# Altium PCB ROBOT_MOTHERBOARD.PcbDoc (part 1 of 3)
Units mm, origin at the board's own origin, x right, y up, seen from the top; angles counter-clockwise.
Board outline 122.81 x 59.7 mm, 4 copper layers (SIG1, GND, PWR, SIG2), stack 0.603 mm thick; 150 components, 74 nets, 540 pads, 464 vias.
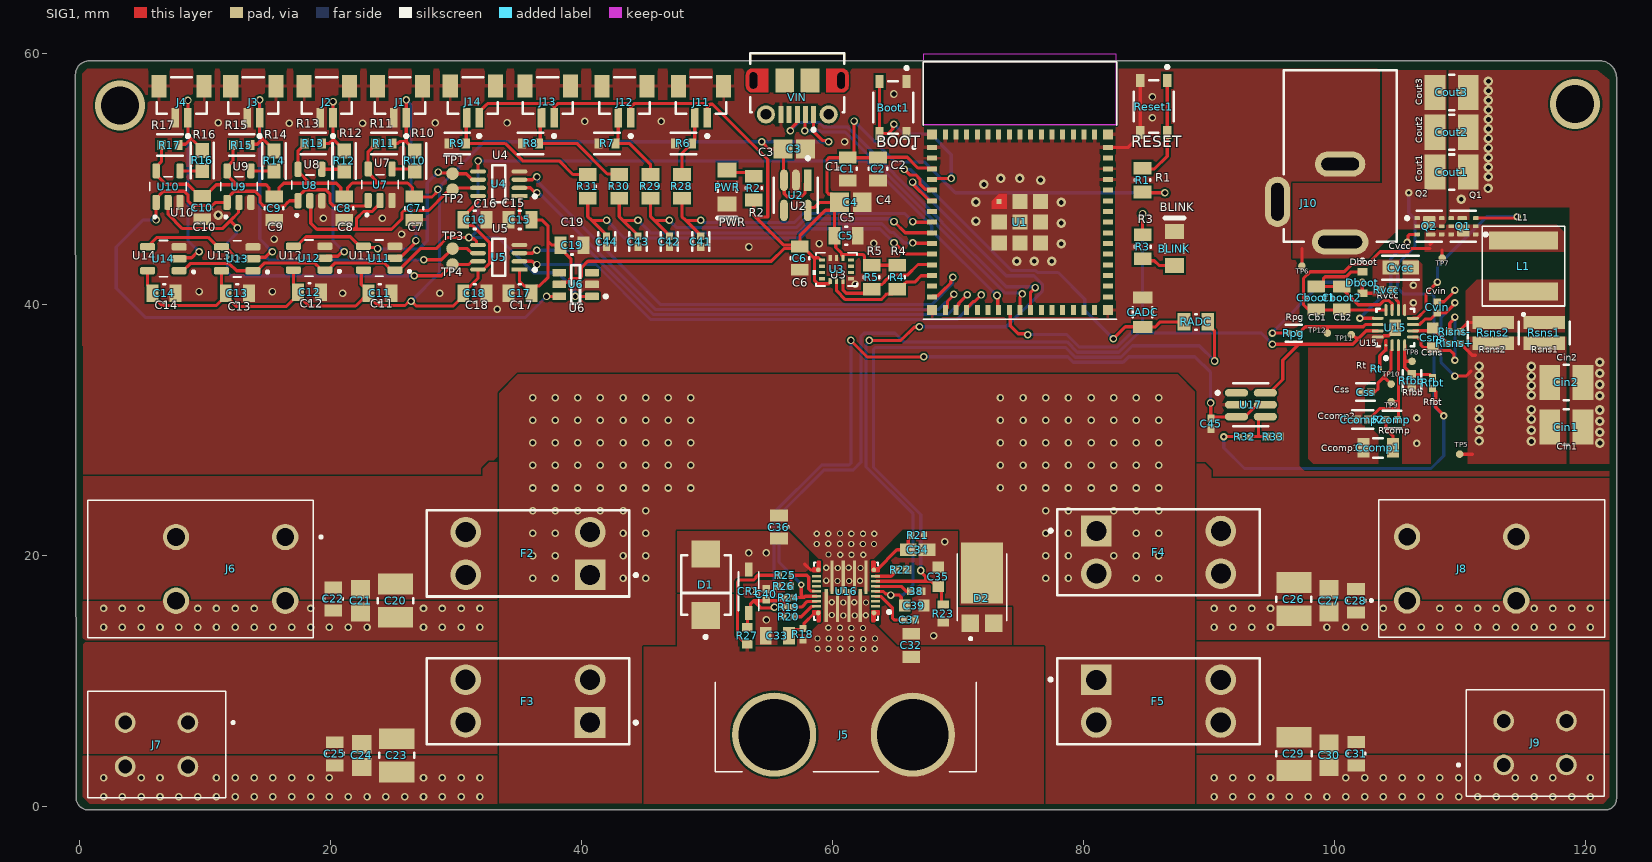
[diagram p0: SIG1 view]
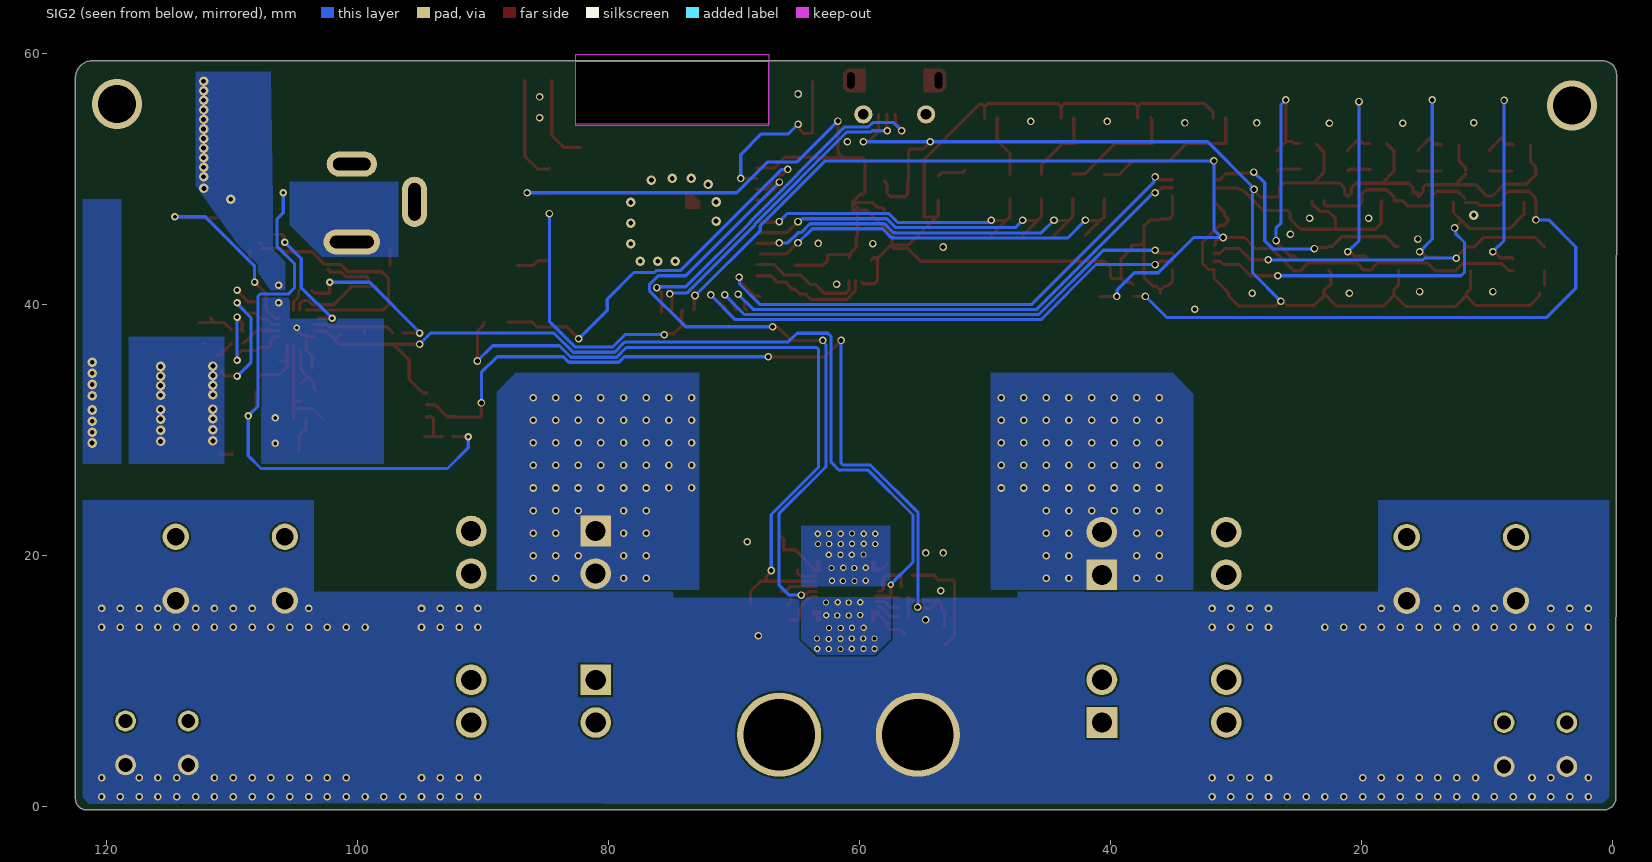
[diagram p1: SIG2 view, seen from below]
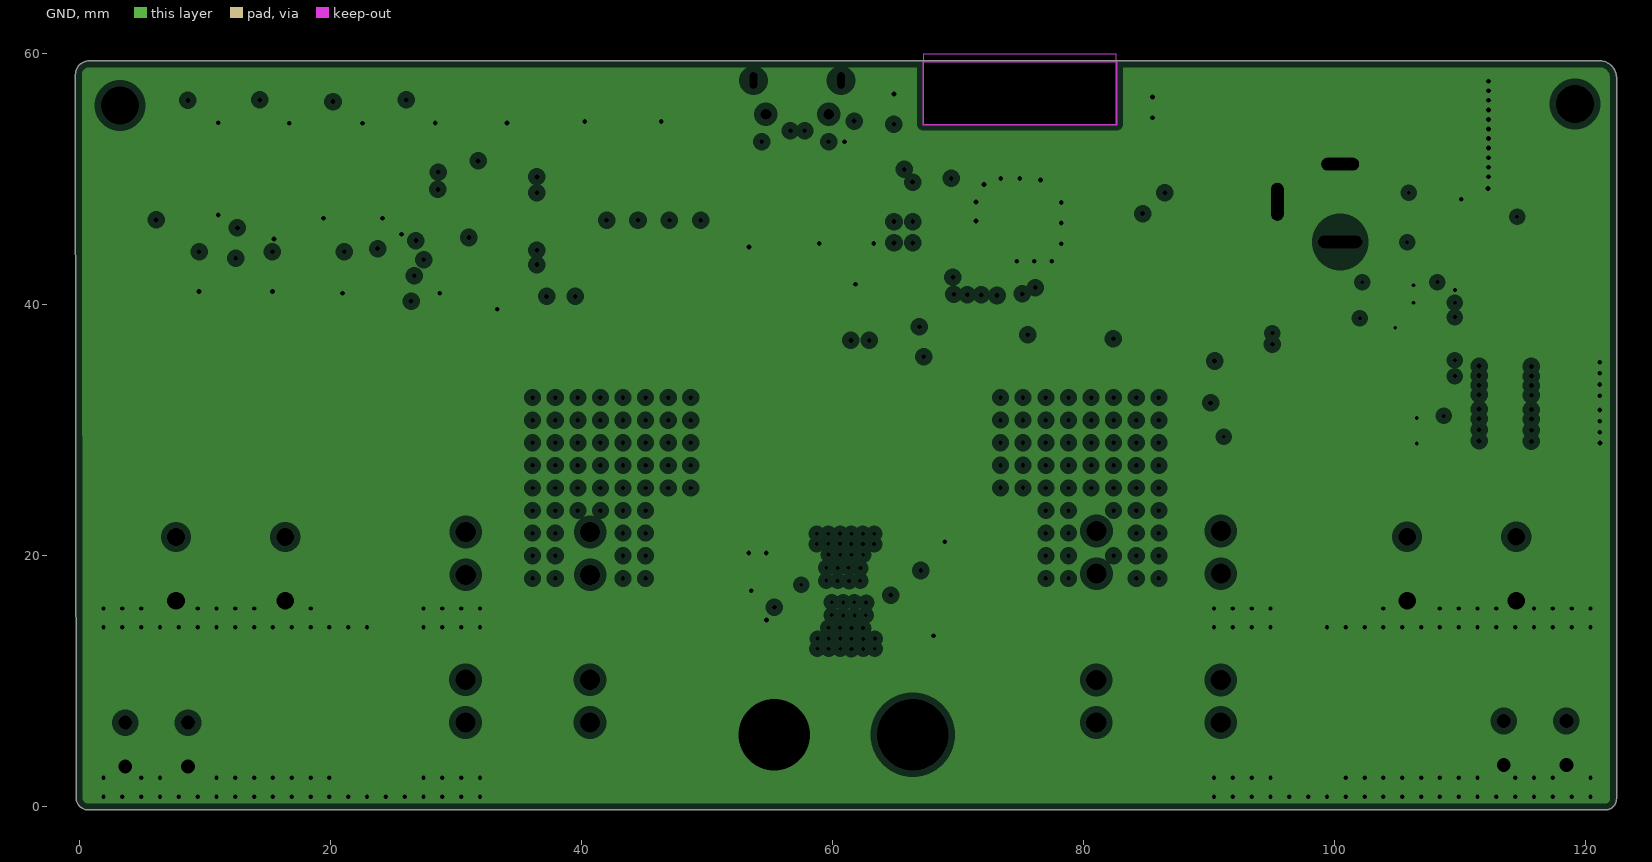
[diagram p2: GND, clearances drawn from the general rule]
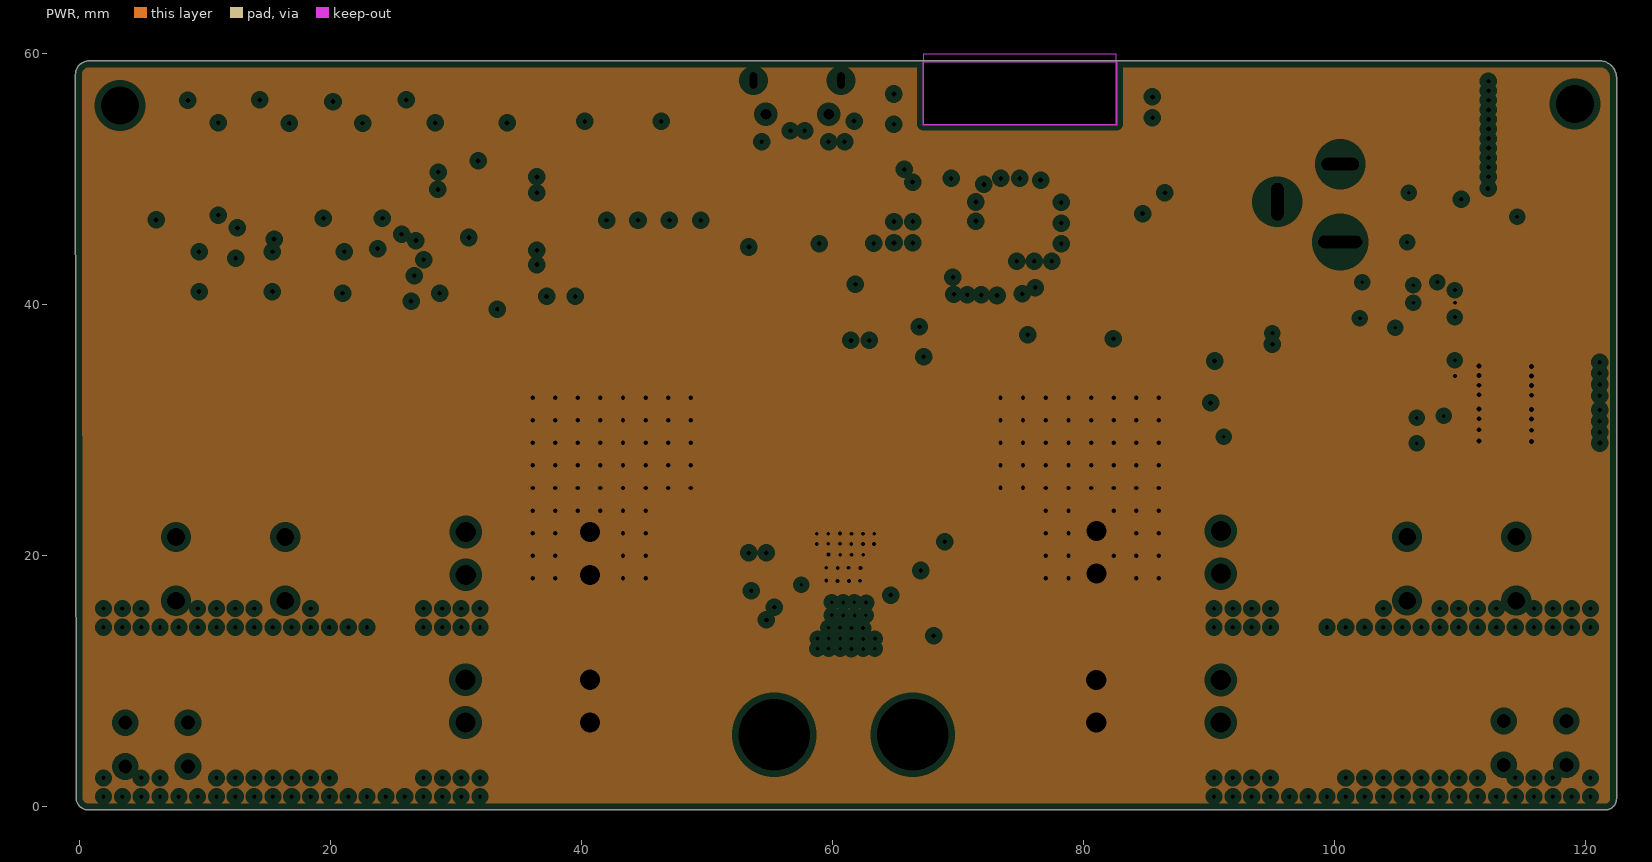
[diagram p3: PWR, clearances drawn from the general rule]
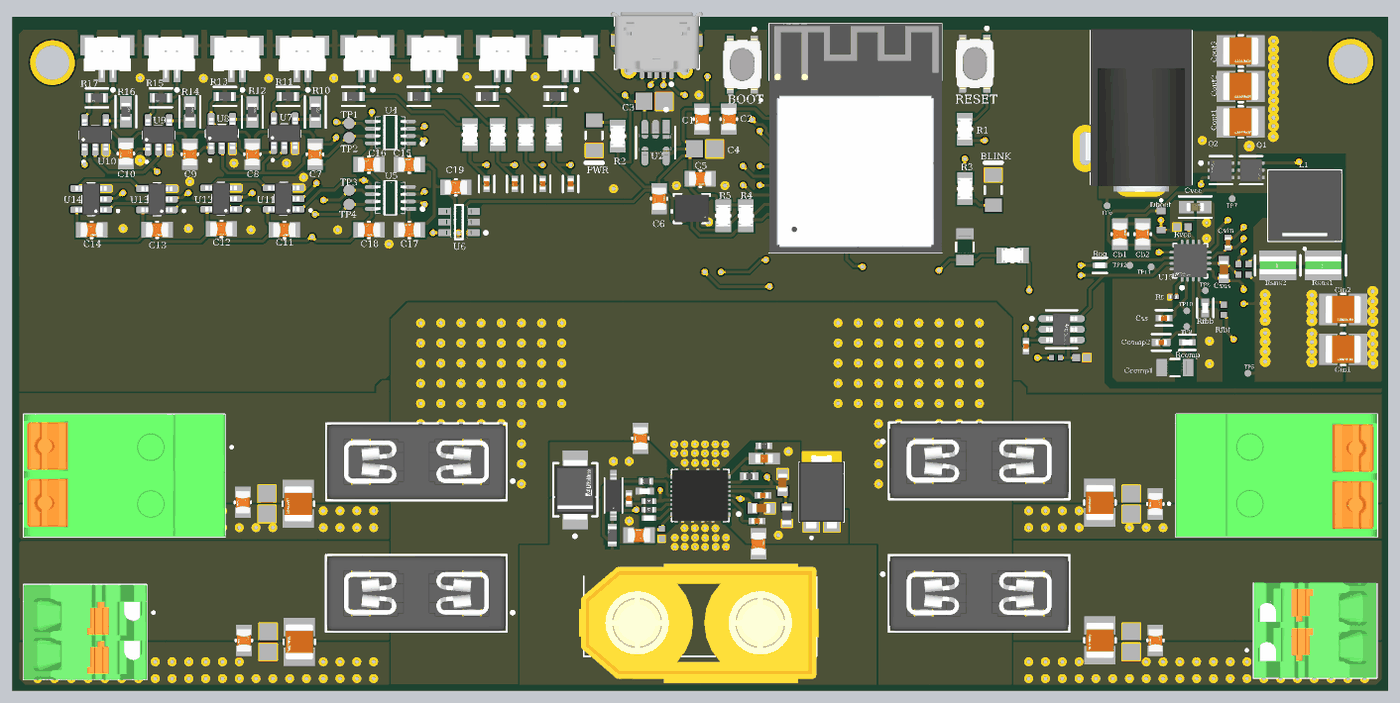
[diagram p5: 3D render of the assembled board from above, using the file's embedded part models]

## Layer stack, top to bottom
Top Solder: solder mask 0.0102, Solder Resist, Dk 3.5
SIG1: signal copper 0.0356
Dielectric 2: prepreg 0.0711, PP-006, Dk 4.1
GND: plane copper 0.035, net GND
Dielectric 1: dielectric 0.32, FR-4, Dk 4.8
PWR: plane copper 0.035, net 11V1+
Dielectric 3: prepreg 0.0711, PP-006, Dk 4.1
SIG2: signal copper 0.0356
Bottom Solder: solder mask 0.0102, Solder Resist, Dk 3.5

## Board outline
-0.284,0.685 -0.329,58.331 cw(c0.746,58.331) 0.746,59.406 0.686,59.406 121.07,59.406 121.07,59.413 cw(c121.134,58.068) 122.48,58.009 122.48,0.605 cw(c121.591,0.605) 121.591,-0.284 0.687,-0.284 0.685,-0.284 cw(c0.685,0.685)
cut-out: 67.23,54.356 82.63,54.356 82.63,59.944 67.23,59.944

## Design rules (kind name [scope] priority, off if disabled: settings)
Clearance Clearance_1 [All] p1: gap=0.15 ignorepadtopadclearanceinfootprint=TRUE
Clearance [InComponent('U16')] p2: gap=0.1 ignorepadtopadclearanceinfootprint=TRUE
HoleSize [All] p1: absolutevalues=TRUE maxlimit=6 minlimit=0.025 maxpercent=80.000 minpercent=20.000
PlaneClearance [All] p1: clearance=0.508
PlaneConnect [All] p1: planeconnectstyle=Direct reliefexpansion=0.508 reliefentries=4 reliefconductorwidth=0.254 reliefairgap=0.254
PolygonConnect [All] p1: connectstyle=Relief reliefconductorwidth=0.254 reliefentries=4 polygonreliefangle="90 Angle" airgapwidth=0.254
RoutingVias [All] p1: holewidth=0.711 width=1.27 viastyle="Through Hole" minholewidth=0.711 minwidth=1.27 maxholewidth=0.711 maxwidth=1.27
SolderMaskExpansion [All] p1: expansion=0.102 istentingtop=FALSE
SupplyNets "Schematic Supply Nets_2" [InNet('3V3')] p1: voltage=0.000
SupplyNets "Schematic Supply Nets_1" [InNet('+5')] p2: voltage=0.000
SupplyNets "Schematic Supply Nets" [InNet('GND')] p3: voltage=0.000
Width [All] p1: maxlimit=1 minlimit=0.254 preferedwidth=0.254
27 further rules are at their usual default settings.

## Classes and differential pairs
component class Battery_power: 38 C32 C33 C34 C35 C36 C37 C39 C40 C41 C42 C43 C44 CADC CR1 D1 D2 R18 R19 R20 R21 R22 R23 R24 R25 R26 R27 R28 R29 R30 R31 RADC U16
component class Jetson_power: C20 C21 C22 C23 C24 C25 C26 C27 C28 C29 C30 C31 C45 Cboot1 Cboot2 Ccomp1 Ccomp2 Cin1 Cin2 Cout1 Cout2 Cout3 Csns Css Cvcc Cvin Dboot F2 F3 F4 F5 J5 J6 J7 J8 J9 J10 L1 Q1 Q2 R32 R33 Rcomp Rfbb Rfbt Risns+ Risns- Rpg Rsns1 Rsns2 Rt Rvcc U15 U17
component class UART_LOGIC: C7 C8 C9 C10 C11 C12 C13 C14 C15 C16 C17 C18 C19 J1 J2 J3 J4 R10 R11 R12 R13 R14 R15 R16 R17 U4 U5 U6 U7 U8 U9 U10 U11 U12 U13 U14
component class MCU_IMU: BLINK Boot1 C1 C2 C3 C4 C5 C6 J11 J12 J13 J14 PWR R1 R2 R3 R4 R5 R6 R7 R8 R9 Reset1 U1 U2 U3 VIN

## Components (designator, comment, footprint, x,y, rotation, side; value= is the part's Value field where it differs from the comment)
38 "GRM155R71H104KE14D" FP-GRM155-0_05-IPC_B 66.675,17.145 r0 top
BLINK "SML-LX1206IC-TR" LUMX-SML-LX1206IC_V 87.249,44.45 r90 top
Boot1 "PTS810SJM250SMTRLFS" FP-PTS810SJM250SMTRLFS-MFG 64.83,55.689 r270 top
C1 "CC0805KRX7R9BB104" FP-CC0805-0_85-MFG#1 61.214,50.8 r270 top value="100 nF"
C2 "CC0805KRX7R9BB104" FP-CC0805-0_85-MFG#1 63.627,50.8 r270 top value="100 nF"
C3 "C0805C105K5RACTU" CAPC2013X140X50ML20T25#1 56.956,52.387 r180 top
C4 "C0805C105K5RACTU" CAPC2013X140X50ML20T25#2 61.468,48.133 r180 top
C5 "CC0805KRX7R9BB104" FP-CC0805-0_85-MFG#1 61.087,45.466 r0 top value="100 nF"
C6 "CC0805KRX7R9BB104" FP-CC0805-0_85-MFG#1 57.404,43.688 r90 top value="100 nF"
C7 "CC0805KRX7R9BB104" FP-CC0805-0_85-MFG#2 26.67,47.661 r90 top value="100 nF"
C8 "CC0805KRX7R9BB104" FP-CC0805-0_85-MFG#1 21.082,47.661 r270 top value="100 nF"
C9 "CC0805KRX7R9BB104" FP-CC0805-0_85-MFG#1 15.494,47.661 r270 top value="100 nF"
C10 "CC0805KRX7R9BB104" FP-CC0805-0_85-MFG#1 9.779,47.716 r270 top value="100 nF"
C11 "CC0805KRX7R9BB104" FP-CC0805-0_85-MFG#1 23.934,40.891 r0 top value="100 nF"
C12 "CC0805KRX7R9BB104" FP-CC0805-0_85-MFG#1 18.321,40.975 r0 top value="100 nF"
C13 "CC0805KRX7R9BB104" FP-CC0805-0_85-MFG#1 12.573,40.902 r0 top value="100 nF"
C14 "CC0805KRX7R9BB104" FP-CC0805-0_85-MFG#1 6.731,40.894 r0 top value="100 nF"
C15 "CC0805KRX7R9BB104" FP-CC0805-0_85-MFG#1 35.088,46.736 r180 top value="100 nF"
C16 "CC0805KRX7R9BB104" FP-CC0805-0_85-MFG#1 31.496,46.736 r0 top value="100 nF"
C17 "CC0805KRX7R9BB104" FP-CC0805-0_85-MFG#1 35.088,40.894 r180 top value="100 nF"
C18 "CC0805KRX7R9BB104" FP-CC0805-0_85-MFG#1 31.496,40.894 r0 top value="100 nF"
C19 "CC0805KRX7R9BB104" FP-CC0805-0_85-MFG#1 39.243,44.704 r0 top value="100 nF"
C20 "CL32A106KBJNNNE" FP-CL32-IPC_B 25.18,16.399 r270 top
C21 "C0805C105K5RACTU" CAPC2013X140X50ML20T25#1 22.386,16.399 r90 top
C22 "CC0805KRX7R9BB104" FP-CC0805-0_85-MFG#1 20.227,16.526 r270 top value="100 nF"
C23 "CL32A106KBJNNNE" FP-CL32-IPC_B 25.273,4.056 r270 top
C24 "C0805C105K5RACTU" CAPC2013X140X50ML20T25#1 22.479,4.056 r90 top
C25 "CC0805KRX7R9BB104" FP-CC0805-0_85-MFG#1 20.32,4.183 r270 top value="100 nF"
C26 "CL32A106KBJNNNE" FP-CL32-IPC_B 96.766,16.51 r270 top
C27 "C0805C105K5RACTU" CAPC2013X140X50ML20T25#1 99.568,16.383 r90 top
C28 "CC0805KRX7R9BB104" FP-CC0805-0_85-MFG#1 101.719,16.383 r270 top value="100 nF"
C29 "CL32A106KBJNNNE" FP-CL32-IPC_B 96.774,4.191 r270 top
C30 "C0805C105K5RACTU" CAPC2013X140X50ML20T25#1 99.568,4.064 r90 top
C31 "CC0805KRX7R9BB104" FP-CC0805-0_85-MFG#1 101.727,4.191 r270 top value="100 nF"
C32 "CC0805KRX7R9BB104" FP-CC0805-0_85-MFG#1 66.275,12.827 r90 top value="100 nF"
C33 "CC0805KKX7R9BB225" FP-CC0805-0_85-MFG#1 55.607,13.589 r180 top value="2.2 uF"
C34 "C1608C0G1E472J080AA" FP-C1608-080-0_1-IPC_A 66.783,20.447 r180 top
C35 "GRM1885C1H101JA01D" CAPC1608X90N 68.434,18.288 r270 top value=100pF
C36 "CC0805KKX7R9BB225" FP-CC0805-0_85-MFG#1 55.734,22.261 r270 top value="2.2 uF"
C37 "GRM155R71H104KE14D" FP-GRM155-0_05-IPC_B 66.148,14.859 r0 top
C39 "GRM1885C1H101JA01D" CAPC1608X90N 66.529,16.002 r180 top value=100pF
C40 "GRM155R71H104KE14D" FP-GRM155-0_05-IPC_B 54.718,16.891 r90 top
C41 "GRM155R71H104KE14D" FP-GRM155-0_05-IPC_B 49.5,45 r270 top
C42 "GRM155R71H104KE14D" FP-GRM155-0_05-IPC_B 47,45 r270 top
C43 "GRM155R71H104KE14D" FP-GRM155-0_05-IPC_B 44.5,45 r270 top
C44 "GRM155R71H104KE14D" FP-GRM155-0_05-IPC_B 42,45 r270 top
C45 "GRM155R71H104KE14D" FP-GRM155-0_05-IPC_B 90.17,30.48 r270 top
CADC "CGA4C2C0G1H822J060AA" FP-CGA4J-IPC_A 84.709,39.37 r90 top
Cboot1 "CC0805KRX7R9BB104" FP-CC0805-0_85-MFG#1 98.552,40.513 r90 top value="100 nF"
Cboot2 "CC0805KRX7R9BB104" FP-CC0805-0_85-MFG#1 100.584,40.513 r90 top value="100 nF"
Ccomp1 "CGA4C2C0G1H822J060AA" FP-CGA4J-IPC_A 103.473,28.575 r180 top
Ccomp2 "GRM1555C1H391JA01J" FP-GRM155-0_05-IPC_A 102.244,30.829 r180 top
Cin1 "CL32A106KBJNNNE" FP-CL32-IPC_B 118.491,30.226 r0 top
Cin2 "CL32A106KBJNNNE" FP-CL32-IPC_B 118.491,33.782 r0 top
Cout1 "CL32B106KBJNNWE" FP-CL32-IPC_B 109.347,50.546 r0 top
Cout2 "CL32B106KBJNNWE" FP-CL32-IPC_B 109.347,53.721 r0 top
Cout3 "CL32B106KBJNNWE" FP-CL32-IPC_B 109.347,56.896 r0 top
CR1 "BZT52C4V7-7-F" SOD123_DIO 53.321,17.145 r90 top
Csns "GRM1885C1H101JA01D" CAPC1608X90N 107.823,37.343 r270 top value=100pF
Css "GRM155R71H104KE14D" FP-GRM155-0_05-IPC_B 102.489,33.02 r180 top
Cvcc "GRM188R61C106MA73D" FP-GRM188-0_2-IPC_A 105.283,42.931 r0 top
Cvin "GRM155R71C104KA88D" CAPC1005X55N 108.204,39.756 r270 top value=100nF
D1 "SMBJ12A" FP-SMBJ-MFG 49.911,17.653 r90 top
D2 "PDS1040-13" DIO_PDS1040-13 71.913,17.461 r90 top
Dboot "XBS053V15R-G" DIO_XBS053V15R-G 102.235,41.744 r270 top
F2 "3568" FP-3568-MFG 35.73,20.154 r180 top
F3 "3568" FP-3568-MFG 35.723,8.392 r180 top
F4 "3568" FP-3568-MFG 85.986,20.242 r0 top
F5 "3568" FP-3568-MFG 85.979,8.382 r0 top
J1 "BM02B-SRSS-TBT(LF)(SN)" FP-BM02B-SRSS-TBT_LF_SN-MFG 25.535,56.639 r180 top
J2 "BM02B-SRSS-TBT(LF)(SN)" FP-BM02B-SRSS-TBT_LF_SN-MFG 19.693,56.639 r180 top
J3 "BM02B-SRSS-TBT(LF)(SN)" FP-BM02B-SRSS-TBT_LF_SN-MFG 13.843,56.642 r180 top
J4 "BM02B-SRSS-TBT(LF)(SN)" FP-BM02B-SRSS-TBT_LF_SN-MFG 8.128,56.642 r180 top
J5 "XT90PW-M" "AMASS_XT90PW-M - duplicate" 61.068,14.859 r180 top
J6 "1017503" PHOENIX_1017503 0.633,24.403 r270 top
J7 "1862042" PHOENIX_1862042 0.636,9.175 r270 top
J8 "1017503" PHOENIX_1017503 121.539,13.462 r90 top
J9 "1862042" PHOENIX_1862042 121.491,0.802 r90 top
J10 "KLDX-0202-B" KYCN-KLDX-0202-B_V 100.457,58.681 r270 top
J11 "BM02B-SRSS-TBT(LF)(SN)" FP-BM02B-SRSS-TBT_LF_SN-MFG 49.522,56.642 r180 top
J12 "BM02B-SRSS-TBT(LF)(SN)" FP-BM02B-SRSS-TBT_LF_SN-MFG 43.426,56.642 r180 top
J13 "BM02B-SRSS-TBT(LF)(SN)" FP-BM02B-SRSS-TBT_LF_SN-MFG 37.308,56.654 r180 top
J14 "BM02B-SRSS-TBT(LF)(SN)" FP-BM02B-SRSS-TBT_LF_SN-MFG 31.339,56.654 r180 top
L1 "XAL6060-472MEB" IND_XAL6060-472MEB 115.062,43.058 r90 top value=4.7µH
PWR "SML-LX1206IC-TR" LUMX-SML-LX1206IC_V 51.6,49.347 r270 top
Q1 "CSD17571Q2" FP-DQK0006C-MFG 110.277,46.228 r180 top
Q2 "CSD17571Q2" FP-DQK0006C-MFG 107.569,46.228 r0 top
R1 "CRCW08054K70FKEA" FP-CRCW0805-e3-IPC_B 84.709,49.911 r90 top
R2 "CRCW08054K70FKEA" FP-CRCW0805-e3-IPC_B 53.721,49.276 r90 top
R3 "CRCW08054K70FKEA" FP-CRCW0805-e3-IPC_B 84.719,44.588 r270 top
R4 "CRCW08054K70FKEA" FP-CRCW0805-e3-IPC_B 65.151,42.164 r270 top
R5 "CRCW08054K70FKEA" FP-CRCW0805-e3-IPC_B 63.119,42.164 r270 top
R6 "RC0603FR-0710KL" FP-RC0603-0_55-IPC_C 48.125,52.832 r180 top
R7 "RC0603FR-0710KL" FP-RC0603-0_55-IPC_C 42.029,52.832 r180 top
R8 "RC0603FR-0710KL" FP-RC0603-0_55-IPC_C 35.933,52.832 r180 top
R9 "RC0603FR-0710KL" FP-RC0603-0_55-IPC_C 30.099,52.832 r180 top
R10 "RMCF0603FG47R0" FP-RMCF0603-IPC_A 26.704,51.435 r90 top
R11 "RC0603FR-0710KL" FP-RC0603-0_55-IPC_C 24.249,52.832 r180 top
R12 "RMCF0603FG47R0" FP-RMCF0603-IPC_A 21.082,51.435 r90 top
R13 "RC0603FR-0710KL" FP-RC0603-0_55-IPC_C 18.627,52.832 r180 top
R14 "RMCF0603FG47R0" FP-RMCF0603-IPC_A 15.494,51.435 r90 top
R15 "RC0603FR-0710KL" FP-RC0603-0_55-IPC_C 12.912,52.705 r180 top
R16 "RMCF0603FG47R0" FP-RMCF0603-IPC_A 9.779,51.474 r90 top
R17 "RC0603FR-0710KL" FP-RC0603-0_55-IPC_C 7.197,52.705 r180 top
R18 "CRCW040210R0FKED" RESC1005X40X25NL05T05 57.639,13.716 r90 top
R19 "CRCW040210K0FKEDC" FP-CRCW0402-C-e3-IPC_C 56.496,15.875 r0 top
R20 "CRCW0402100KFKED" FP-CRCW0402-e3-IPC_C 56.496,15.113 r180 top
R21 "RT0402BRD0748K7L" FP-RT0402-MFG 66.783,21.59 r0 top value=48.7KΩ
R22 "RC0402FR-07499RL" FP-RC0402-0_4-IPC_A 65.455,18.865 r0 top
R23 "ERA3AEB102V" RES_ERA3AEB102V 68.815,15.367 r90 top value=1k
R24 "CRCW040210K0FKEDC" FP-CRCW0402-C-e3-IPC_C 56.496,16.637 r0 top
R25 "CRCW04021M00FKED" CRCW0402-e3_MFG 56.242,18.415 r180 top
R26 "CRCW0402121KFKED" FP-CRCW0402-e3-MFG 56.115,17.526 r180 top
R27 "RC0603FR-0710KL" FP-RC0603-0_55-IPC_C 53.213,13.589 r90 top
R28 "CRCW08054K70FKEA" FP-CRCW0805-e3-IPC_B 48,49.4 r270 top
R29 "CRCW08054K70FKEA" FP-CRCW0805-e3-IPC_B 45.5,49.4 r270 top
R30 "CRCW08054K70FKEA" FP-CRCW0805-e3-IPC_B 43,49.4 r270 top
R31 "CRCW08054K70FKEA" FP-CRCW0805-e3-IPC_B 40.5,49.4 r270 top
R32 "CRCW0402475KFKED" RESC1005X40X25LL05T05 92.837,29.464 r0 top
R33 "CRCW040210K0FKEDHP" RESC1005X40X25ML05T10 95.123,29.464 r0 top
RADC "CRCW08054K70FKEA" FP-CRCW0805-e3-IPC_B 88.965,38.608 r180 top
Rcomp "CRCW04025K36FKED" FP-CRCW0402-e3-IPC_B 104.572,30.829 r0 top
Reset1 "PTS810SJM250SMTRLFS" FP-PTS810SJM250SMTRLFS-MFG 85.599,55.773 r270 top
Rfbb "CRCW040211K0FKED" FP-CRCW0402-e3-IPC_A 106.172,33.92 r270 top
Rfbt "CRCW0402150KFKED" RESC1005X40X25NL05T05 107.823,33.749 r270 top
Risns+ "CRCW040210R0FKED" RESC1005X40X25NL05T05 109.587,36.895 r180 top
Risns- "CRCW040210R0FKED" RESC1005X40X25NL05T05 109.589,37.828 r0 top
Rpg "CRCW0402100KFKED" FP-CRCW0402-e3-IPC_C 96.774,37.719 r0 top
Rsns1 "PRL1632-R010-F-T1" FP-PRL1632-MFG 116.713,37.724 r90 top
Rsns2 "PRL1632-R010-F-T1" FP-PRL1632-MFG 112.649,37.724 r90 top
Rt "RC0201FR-07105KL" RESC0603X26N 103.331,34.893 r180 top value=105k
Rvcc "CRCW04022R00FKED" RESC1005X40X25ML05T05 104.14,41.153 r180 top
U1 "ESP32-S3-MINI-1-N8" XCVR_ESP32-S3-MINI-1-N8 74.938,46.556 r0 top
U2 "AP2112K-3.3TRG1" FP-SOT25-IPC_A 57.084,48.699 r270 top
U3 "BMI323" BMI323_BOS 60.325,42.799 r180 top
U4 "SN74LVC2T45DCTR" FP-DCT0008A-IPC_C 33.402,49.616 r180 top
U5 "SN74LVC2T45DCTR" FP-DCT0008A-IPC_C 33.4,43.759 r180 top
U6 "SN74LVC2G04DBVRG4" FP-DBV0006A-MFG 39.527,41.59 r180 top
U7 "SN74AHCT1G125DBVT" SOT95P280X145-5N 23.942,49.545 r90 top
U8 "SN74AHCT1G125DBVT" SOT95P280X145-5N 18.354,49.515 r90 top
U9 "SN74AHCT1G125DBVT" SOT95P280X145-5N 12.7,49.388 r90 top
U10 "SN74AHCT1G125DBVT" SOT95P280X145-5N 7.051,49.388 r90 top
U11 "SN74AHCT1G125DBVT" SOT95P280X145-5N 23.876,43.688 r180 top
U12 "SN74AHCT1G125DBVT" SOT95P280X145-5N 18.288,43.688 r180 top
U13 "SN74AHCT1G125DBVT" SOT95P280X145-5N 12.558,43.635 r180 top
U14 "SN74AHCT1G125DBVT" SOT95P280X145-5N 6.673,43.642 r180 top
U15 "TPS43060RTER" FP-RTE0016E-IPC_B 104.853,38.148 r90 top
U16 "TPS259851RQPR" RQP0026A-MFG 61.081,17.137 r180 top
U17 "TPS3700DDCR" FP-DDC0006A-IPC_A 93.345,32.004 r0 top
VIN "105017-0001" USB-MICRO-B_V 57.194,56.498 r180 top

## Footprints (in the part's own frame and the unit in brackets; to place one, negate y for a bottom-side part, rotate by r counter-clockwise, add the part's x,y. Pads: shape width x height; smd on the part's side, far side on the other; paste and mask are expansions set on the pad)
"AMASS_XT90PW-M - duplicate" [mm]
  round 6.7 hole 5.7: N(5.715,9.144) P(-5.334,9.144)
  silkscreen extent -10.4,4.95 10.4,12.1, body extent -10.57,3.81 10.83,14.51, height 20.8
BMI323_BOS [mil]
  rect 19x10 smd paste+0 mask+0: 1(-45.5,29.53) 2(-45.5,9.84) 3(-45.5,-9.84) 4(-45.5,-29.53) 8(45.5,-29.53) 9(45.5,-9.84) 10(45.5,9.84) 11(45.5,29.53)
  rect 10x19 smd paste+0 mask+0: 5(-19.68,-36) 6(0,-36) 7(19.68,-36) 12(19.68,36) 13(0,36) 14(-19.68,36)
  silkscreen extent -64,-52 75,52, body extent -59,-47 59,47, height 34
CAPC1005X55N [mm]
  rect 0.54x0.6 smd: 1(-0.432,0) 2(0.432,0)
  body extent -0.5,-0.25 0.5,0.25, height 0.55
CAPC1608X90N [mm]
  rect 0.89x0.93 smd: 1(-0.77,0) 2(0.77,0)
  body extent -0.8,-0.4 0.8,0.4, height 0.9
CAPC2013X140X50ML20T25#1 [mm] "Chip Capacitor, 2-Leads, Body 2.00x1.25mm, IPC Low Density"
  rect 1.5x1.55 smd: 1(-0.9,0) 2(0.9,0)
  body extent -1.1,-0.72 1.1,0.72, height 1.4
CAPC2013X140X50ML20T25#2 [mm] "Chip Capacitor, 2-Leads, Body 2.00x1.25mm, IPC Low Density"
  rect 1.5x1.55 smd: 2(0.9,0) ""(-0.9,0)
  body extent -1.1,-0.72 1.1,0.72, height 1.4
CRCW0402-e3_MFG [mm] "Recommended Land Pattern"
  rect 0.4x0.6 smd paste+0 mask+0: 1(-0.45,0) 2(0.45,0)
  body extent -0.5,-0.25 0.5,0.25, height 0.35
DIO_PDS1040-13 [mm]
  rect 1.4x1.39 smd: 1(-2.856,0.92) 2(-2.856,-0.92)
  rect 4.86x3.36 smd paste-3: 3(1.126,0)
  silkscreen extent -4.2,-1.98 2.69,1.98, body extent -3.25,-1.98 3.25,1.98, height 1.15
DIO_XBS053V15R-G [mm]
  rect 0.6x0.8 smd: A(0.85,0) C(-0.85,0)
  silkscreen extent -1.9,-0.1 -1.7,0.1
FP-3568-MFG [mm]
  round 2.45 hole 1.6 paste-2539.97 mask+0: 1(-4.96,-1.7) 2(4.96,-1.7) 2(4.96,1.7)
  rect 2.45x2.45 hole 1.6 paste-2539.97 mask+0: 1(-4.96,1.7)
  silkscreen extent -8.73,-3.43 8.07,3.43, body extent -8.17,-3.53 8.17,3.53, height 0.25
FP-BM02B-SRSS-TBT_LF_SN-MFG [mm]
  rect 0.6x1.55 smd paste+0 mask+0: 1(-0.5,1.775) 2(0.5,1.775)
  rect 1.2x1.8 smd paste+0 mask+0: 3(-1.8,-0.75) 4(1.8,-0.75)
  silkscreen extent -2,-1.45 2,3.35, body extent -2.5,-1.75 2.5,2.65, height 0.25
FP-C1608-080-0_1-IPC_A [mm]
  rect 1.331x1.012 smd paste+0 mask+0: 1(-0.741,0) 2(0.741,0)
  body extent -1.91,-1.01 1.91,1.01, height 0.25
FP-CC0805-0_85-MFG#1 [mm]
  rect 0.95x1.4 smd paste+0 mask+0: 1(-0.925,0) 2(0.925,0)
  silkscreen extent -0.08,-0.72 0.08,0.72, body extent -1.6,-1.05 1.6,1.05, height 0.25
FP-CC0805-0_85-MFG#2 [mm]
  rect 0.95x1.4 smd paste+0 mask+0: 1(0.925,0) 2(-0.925,0)
  silkscreen extent -0.08,-0.72 0.08,0.72, body extent -1.6,-1.05 1.6,1.05, height 0.25
FP-CGA4J-IPC_A [mm]
  rect 0.956x1.556 smd paste+0 mask+0: 1(-1.175,0) 2(1.175,0)
  silkscreen extent -0.4,-0.78 0.4,0.78, body extent -2.15,-1.28 2.15,1.28, height 0.25
FP-CL32-IPC_B [mm]
  rect 1.653x2.804 smd paste+0 mask+0: 1(-1.325,0) 2(1.325,0)
  silkscreen extent -0.2,-1.4 0.2,1.4, body extent -2.4,-1.65 2.4,1.65, height 0.25
FP-CRCW0402-C-e3-IPC_C [mm]
  rect 0.56x0.472 smd paste+0 mask+0: 1(-0.376,0) 2(0.376,0)
  body extent -0.76,-0.38 0.76,0.38, height 0.25
FP-CRCW0402-e3-IPC_A [mm]
  rect 0.668x0.672 smd paste+0 mask+0: 1(-0.502,0) 2(0.502,0)
  silkscreen extent -0.84,-0.74 0.84,0.74, body extent -1.04,-0.54 1.04,0.54, height 0.25
FP-CRCW0402-e3-IPC_B [mm]
  rect 0.568x0.572 smd paste+0 mask+0: 1(-0.452,0) 2(0.452,0)
  silkscreen extent -0.74,-0.69 0.74,0.69, body extent -0.89,-0.44 0.89,0.44, height 0.25
FP-CRCW0402-e3-IPC_C [mm]
  rect 0.468x0.472 smd paste+0 mask+0: 1(-0.402,0) 2(0.402,0)
  body extent -0.74,-0.38 0.74,0.38, height 0.25
FP-CRCW0402-e3-MFG [mm]
  rect 0.6x0.6 smd paste+0 mask+0: 1(-0.525,0) 2(0.525,0)
  body extent -0.92,-0.4 0.92,0.4, height 0.25
FP-CRCW0805-e3-IPC_B [mm]
  rect 1.007x1.408 smd paste+0 mask+0: 1(-0.951,0) 2(0.951,0)
  silkscreen extent -0.07,-0.63 0.07,0.63, body extent -1.7,-0.95 1.7,0.95, height 0.25
FP-DBV0006A-MFG [mm]
  rrect17% 1.1x0.6 smd paste+0 mask+0: 1(-1.3,0.95) 2(-1.3,0) 3(-1.3,-0.95) 4(1.3,-0.95) 5(1.3,0) 6(1.3,0.95)
  silkscreen extent -2.53,-1.53 0.35,1.53, body extent -1.95,-1.78 1.95,1.78, height 0.25
FP-DCT0008A-IPC_C [mm]
  rect 1.254x0.336 smd paste+0 mask+0: 1(-1.65,0.975)
  rrect100% 1.254x0.336 smd paste+0 mask+0: 2(-1.65,0.325) 3(-1.65,-0.325) 4(-1.65,-0.975) 5(1.65,-0.975) 6(1.65,-0.325) 7(1.65,0.325) 8(1.65,0.975)
  silkscreen extent -3,-1.48 0.52,1.48, body extent -2.38,-1.58 2.38,1.58, height 0.25
FP-DDC0006A-IPC_A [mm]
  oval 1.854x0.612 smd paste+0 mask+0: 1(-1.15,0.95)
  rrect100% 1.854x0.612 smd paste+0 mask+0: 2(-1.15,0) 3(-1.15,-0.95) 4(1.15,-0.95) 5(1.15,0) 6(1.15,0.95)
  silkscreen extent -2.77,-1.7 1.4,1.7, body extent -2.58,-1.95 2.58,1.95, height 0.25
FP-DQK0006C-MFG [mm]
  rrect33% 0.45x0.3 smd paste+0 mask+0: 1(-0.975,0.65) 2(-0.975,0) 3(-0.975,-0.65) 4(0.975,-0.65) 5(0.975,0) 6(0.975,0.65)
  rrect33% 0.75x0.3 smd paste-1000 mask+0: 7(0.095,-0.65)
  rrect11% 1x0.95 smd paste-1000 mask+0: 8(0,0.325)
  silkscreen extent -1.9,-1.25 1,1.25, body extent -1.3,-1.15 1.3,1.15, height 0.25
FP-GRM155-0_05-IPC_A [mm]
  rect 0.715x0.672 smd paste+0 mask+0: 1(-0.479,0) 2(0.479,0)
  silkscreen extent -0.84,-0.74 0.84,0.74, body extent -1.04,-0.54 1.04,0.54, height 0.25
FP-GRM155-0_05-IPC_B [mm]
  rect 0.615x0.572 smd paste+0 mask+0: 1(-0.429,0) 2(0.429,0)
  body extent -0.89,-0.44 0.89,0.44, height 0.25
FP-GRM188-0_2-IPC_A [mm]
  rect 1.305x1.106 smd paste+0 mask+0: 1(-0.801,0) 2(0.801,0)
  silkscreen extent -1.45,-0.95 1.45,0.95, body extent -1.95,-1.05 1.95,1.05, height 0.25
FP-PRL1632-MFG [mm]
  rect 1.05x3.3 smd paste+0 mask+0: 1(-0.825,0) 2(0.825,0)
  silkscreen extent -0.9,-2.02 0.9,2.02, body extent -1.45,-1.8 1.45,1.8, height 0.25
FP-PTS810SJM250SMTRLFS-MFG [mm]
  rect 1.05x0.65 smd paste+0 mask+0: 1(-2.075,1.075) 2(2.075,1.075) 3(-2.075,-1.075) 4(2.075,-1.075)
  silkscreen extent -3.27,-1.6 2.1,1.6, body extent -2.7,-1.7 2.7,1.7, height 0.25
FP-RC0402-0_4-IPC_A [mm]
  rect 0.715x0.672 smd paste+0 mask+0: 1(-0.479,0) 2(0.479,0)
  body extent -1.04,-0.54 1.04,0.54, height 0.25
FP-RC0603-0_55-IPC_C [mm]
  rect 0.659x0.812 smd paste+0 mask+0: 1(-0.677,0) 2(0.677,0)
  silkscreen extent -1.01,-0.85 1.01,0.85, body extent -1.11,-0.55 1.11,0.55, height 0.25
FP-RMCF0603-IPC_A [mm]
  rect 1.206x1.058 smd paste+0 mask+0: 1(-0.801,0) 2(0.801,0)
  silkscreen extent -1.4,-0.93 1.4,0.93, body extent -1.9,-1.03 1.9,1.03, height 0.25
FP-RT0402-MFG [mm]
  rect 0.5x0.6 smd paste+0 mask+0: 1(-0.5,0) 2(0.5,0)
  body extent -0.85,-0.4 0.85,0.4, height 0.25
FP-RTE0016E-IPC_B [mm]
  round 0.215 smd paste+0 mask+0: 1(-1.413,0.75)
  rrect100% 0.957x0.239 smd paste+0 mask+0: 2(-1.401,0.25) 3(-1.401,-0.25) 4(-1.401,-0.75) 9(1.401,-0.75) 10(1.401,-0.25) 11(1.401,0.25) 12(1.401,0.75)
  rrect100% 0.239x0.957 smd paste+0 mask+0: 5(-0.75,-1.401) 6(-0.25,-1.401) 7(0.25,-1.401) 8(0.75,-1.401) 13(0.75,1.401) 14(0.25,1.401) 15(-0.25,1.401) 16(-0.75,1.401)
  rect 1.3x0.9 smd paste-1000 mask+0: 17(0,0)
  SIG1 region: -1.879,0.87 -1.042,0.87 -0.996,0.861 -0.957,0.835 -0.931,0.796 -0.922,0.75 -0.922,0.75 -0.931,0.704 -0.957,0.665 -0.996,0.639 -1.042,0.63 -1.042,0.63 -1.879,0.63
  silkscreen extent -2.55,-1.5 1.5,1.5, body extent -2.13,-2.13 2.13,2.13, height 0.25
FP-SMBJ-MFG [mm]
  rect 2.16x2.26 smd paste+0 mask+0: 1(-2.45,0) 2(2.45,0)
  silkscreen extent -4.27,-1.97 2.37,1.97, body extent -3.63,-2.07 3.63,2.07, height 0.25
FP-SOT25-IPC_A [mm]
  rect 1.707x0.616 smd paste+0 mask+0: 1(-1.201,0.95)
  rrect100% 1.707x0.616 smd paste+0 mask+0: 2(-1.201,0) 3(-1.201,-0.95) 4(1.201,-0.95) 5(1.201,0.95)
  silkscreen extent -3.08,-1.75 1.4,1.75, body extent -2.55,-2 2.55,2, height 0.25
IND_XAL6060-472MEB [mm]
  rect 1.43x5.5 smd: 1(-2.02,0) 2(2.02,0)
  silkscreen extent -3.95,-3.28 3.18,3.28, body extent -3.18,-3.28 3.18,3.28, height 6.1
KYCN-KLDX-0202-B_V [mm] "3 Conductor Jack, 9 x 14.5 mm Body"
  oval 2x4.5 hole 1 slot 3.5 at 90 deg: 1(13.7,0)
  oval 2x4 hole 1 slot 3 at 90 deg: 2(7.5,0)
  oval 4x2 hole 1 slot 3 at 0 deg: 3(10.5,-5)
  silkscreen extent 0,-4.5 13.7,4.5, body extent -0.15,-5 14.35,4.5, height 11
LUMX-SML-LX1206IC_V [mm] "SMD, 2-Leads, Body 3.2x1.5mm"
  rect 1.2x1.5 smd: 1(-1.35,0) 2(1.35,0)
  silkscreen extent -0.35,-0.75 2.45,0.75, body extent -1.6,-0.8 1.6,0.8, height 1.1
PHOENIX_1017503 [mm]
  round 2.1 hole 1.4: 1_1(2.94,15.75) 1_2(2.94,7.05) 2_1(8.02,15.75) 2_2(8.02,7.05)
  silkscreen extent 0,0 10.96,18.7, body extent 0,0.02 10.96,18.02, height 19
PHOENIX_1862042 [mm]
  round 1.65 hole 1.1: 1_1(2.5,8) 1_2(2.5,3) 2_1(6,8) 2_2(6,3)
  silkscreen extent 0,0 8.5,11.7, body extent 0.02,0 8.52,11, height 10.2
RES_ERA3AEB102V [mm]
  rect 0.65x0.9 smd: 1(-0.725,0) 2(0.725,0)
  body extent -0.8,-0.4 0.8,0.4, height 0.45
RESC0603X26N [mm]
  rect 0.38x0.4 smd: 1(-0.281,0) 2(0.281,0)
  body extent -0.3,-0.15 0.3,0.15, height 0.26
RESC1005X40X25LL05T05 [mm] "Chip Resistor, 2-Leads, Body 1.00x0.50mm, IPC High Density"
  rect 0.45x0.45 smd: 1(-0.4,0) 2(0.4,0)
  body extent -0.53,-0.27 0.53,0.28, height 0.4
RESC1005X40X25ML05T05 [mm] "Chip Resistor, 2-Leads, Body 1.00x0.50mm, IPC Low Density"
  rect 0.65x0.65 smd: 1(-0.5,0) 2(0.5,0)
  body extent -0.53,-0.27 0.53,0.28, height 0.4
RESC1005X40X25ML05T10 [mm] "Chip Resistor, 2-Leads, Body 1.00x0.50mm, IPC Low Density"
  rect 0.7x0.65 smd: 1(-0.475,0) 2(0.475,0)
  body extent -0.53,-0.27 0.53,0.28, height 0.4
RESC1005X40X25NL05T05 [mm] "Chip Resistor, 2-Leads, Body 1.00x0.50mm, IPC Medium Density"
  rect 0.55x0.55 smd: 1(-0.45,0) 2(0.45,0)
  body extent -0.53,-0.27 0.53,0.28, height 0.4
RQP0026A-MFG [mm]
  round 0.394 smd paste-0.184 mask+0: 1(-2.219,1.719) 22(2.219,1.719)
  rect 0.7x0.2 smd paste+0 mask+0: 2(-2.35,1.2) 3(-2.35,0.8) 4(-2.35,0.4) 5(-2.35,0) 6(-2.35,-0.4) 7(-2.35,-0.8) 8(-2.35,-1.2) 15(2.35,-1.2) 16(2.35,-0.8) 17(2.35,-0.4) 18(2.35,0) 19(2.35,0.4) 20(2.35,0.8) 21(2.35,1.2)
  round 0.371 smd paste-0.173 mask+0: 9(-2.219,-1.706) 14(2.219,-1.706)
  rect 0.25x2.65 smd paste-1.312 mask+0: 10(-1.582,-1.125) 11(-0.677,-1.125) 12(0.228,-1.125) 13(1.132,-1.125) 23(1.582,1.125) 24(0.677,1.125) 25(-0.228,1.125) 26(-1.132,1.125)
  SIG1 region: 2.05,-1.5 2.65,-1.5 2.7,-1.55 2.7,-1.85 2.65,-1.9 2.35,-1.9 2.35,-2.4 2.3,-2.45 2.05,-2.45 2,-2.4 2,-1.55
  SIG1 region: 2.05,1.5 2.65,1.5 2.7,1.55 2.7,1.85 2.65,1.9 2.35,1.9 2.35,2.4 2.3,2.45 2.05,2.45 2,2.4 2,1.55
  SIG1 region: -2.05,1.5 -2.65,1.5 -2.7,1.55 -2.7,1.85 -2.65,1.9 -2.35,1.9 -2.35,2.4 -2.3,2.45 -2.05,2.45 -2,2.4 -2,1.55
  SIG1 region: -2.05,-1.5 -2.65,-1.5 -2.7,-1.55 -2.7,-1.85 -2.65,-1.9 -2.35,-1.9 -2.35,-2.4 -2.3,-2.45 -2.05,-2.45 -2,-2.4 -2,-1.55
  silkscreen extent -3.55,1.53 -3.3,1.77, body extent -2.5,-2.25 2.5,2.25, height 1
SOD123_DIO [mm]
  rect 1.111x0.601 smd paste+0 mask+0: 1(-1.725,0) 2(1.725,0)
  silkscreen extent -1.55,-0.8 1.55,0.8, body extent -1.92,-0.67 1.92,0.67, height 0.81
SOT95P280X145-5N [mm]
  rrect50% 1.21x0.59 smd: 1(-1.255,0.95) 2(-1.255,0) 3(-1.255,-0.95) 4(1.255,-0.95) 5(1.255,0.95)
  silkscreen extent -2.51,-1.45 0.8,1.45, body extent -1.4,-1.45 1.4,1.45, height 1.45
USB-MICRO-B_V [mm] "USB, MICRO B, Body 7.491x4.695 mm, Pitch 0.65 mm"
  rect 0.4x1.35 smd: 1(-1.3,1.35) 2(-0.65,1.35) 3(0,1.35) 4(0.65,1.35) 5(1.3,1.35)
  round 1.45 hole 0.85: 6(-2.5,1.35) 7(2.5,1.35)
  rrect50% 0x0 hole 0.6 slot 1.3 at 90 deg: 8(-3.5,-1.35) 11(3.5,-1.35)
  rect 1.5x1.9 smd: 9(-1,-1.35) 10(1,-1.35)
  SIG1 circle w0.5: c3.6,-0.9 r0.25
  SIG1 circle w0.5: c3.6,-1.8 r0.25
  SIG1 circle w0.5: c-3.6,-0.9 r0.25
  SIG1 circle w0.5: c-3.6,-1.8 r0.25
  SIG1 region: -2.3,-2.3 -2.3,-0.4 -3.6,-0.4 -3.6,-2.3
  SIG1 region: 2.3,-0.4 2.3,-2.3 3.6,-2.3 3.6,-0.4
  SIG1 region: 3.6,-0.9 3.6,-1.8 4.1,-1.8 4.1,-0.9
  SIG1 region: -3.6,-1.8 -3.6,-0.9 -4.1,-0.9 -4.1,-1.8
  silkscreen extent -3.75,-3.5 3.75,2.7, body extent -4.1,-3.9 4.1,1.5, height 2.67
XCVR_ESP32-S3-MINI-1-N8 [mm]
  rect 0.8x0.4 smd: 1(-7,5.95) 2(-7,5.1) 3(-7,4.25) 4(-7,3.4) 5(-7,2.55) 6(-7,1.7) 7(-7,0.85) 8(-7,0) 9(-7,-0.85) 10(-7,-1.7) 11(-7,-2.55) 12(-7,-3.4) 13(-7,-4.25) 14(-7,-5.1) 15(-7,-5.95) 31(7,-5.95) 32(7,-5.1) 33(7,-4.25) 34(7,-3.4) 35(7,-2.55) 36(7,-1.7) 37(7,-0.85) 38(7,0) 39(7,0.85) 40(7,1.7) 41(7,2.55) 42(7,3.4) 43(7,4.25) 44(7,5.1) 45(7,5.95)
  rect 0.4x0.8 smd: 16(-5.95,-7) 17(-5.1,-7) 18(-4.25,-7) 19(-3.4,-7) 20(-2.55,-7) 21(-1.7,-7) 22(-0.85,-7) 23(0,-7) 24(0.85,-7) 25(1.7,-7) 26(2.55,-7) 27(3.4,-7) 28(4.25,-7) 29(5.1,-7) 30(5.95,-7) 46(5.95,7) 47(5.1,7) 48(4.25,7) 49(3.4,7) 50(2.55,7) 51(1.7,7) 52(0.85,7) 53(0,7) 54(-0.85,7) 55(-1.7,7) 56(-2.55,7) 57(-3.4,7) 58(-4.25,7) 59(-5.1,7) 60(-5.95,7)
  rect 1.2x1.2 smd: 61(0,0) 61_2(0,1.65) 61_3(1.65,1.65) 61_4(1.65,0) 61_5(1.65,-1.65) 61_6(0,-1.65) 61_7(-1.65,-1.65) 61_8(-1.65,0)
  rect 0.4x0.4 smd paste-1 mask+0: 61_1(-1.65,1.65)
  rect 0.8x0.8 smd: 62(-7,7) 63(-7,-7) 64(7,-7) 65(7,7)
  SIG1 region: -1.05,1.05 -2.25,1.05 -2.25,1.65 -1.65,2.25 -1.05,2.25
  Keep-Out Layer region: 7.7,7.725 -7.7,7.725 -7.7,12.775 7.7,12.775
  Keep-Out Layer region: 7.7,7.725 -7.7,7.725 -7.7,12.775 7.7,12.775
  silkscreen extent -8.55,-7.73 7.7,12.78, body extent -7.7,-7.71 7.7,12.79, height 2.55

## Part data
38 C37 C40 C41 C42 C43 C44 C45 Css: library part CMP-2008-04639-2, "Chip Multilayer Ceramic Capacitors for General Purpose, 0402, 0.10uF, X7R, 15%, 10%, 50V", Capacitance=100nF, Case Code (Imperial)=0402, Case Code (Metric)=1005, Dielectric=X7R, Dielectric Material=Ceramic, Max Operating Temperature=125°C, Min Operating Temperature=-55°C, Package Quantity=10000, Tolerance=10%, Voltage=50V, Case/Package=0402, Depth=0.5mm, Dissipation Factor=0.025%, Height=0.5mm, Lead Free="Lead Free", Length=1mm, Material=Ceramic, Mount="Surface Mount", Packaging="Tape and Reel", REACH SVHC="No SVHC", Resistor Type=Ceramic, Termination=SMD/SMT, Thickness=0.022inch, Voltage Rating=50V, Voltage Rating (DC)=50V, Weight=0.000212oz, Width=0.5mm
BLINK PWR: library part CMP-2000-07123-1, "LED Red, 65 mW, -40 to 85 degC, 2-Pin SMD, RoHS, Tape and Reel", Color=Red, Manufacturer=Lumex, Operating Temperature=-25to85C, Package Description="2-Pin Surface Mount Device, Body 3.2 x 1.5 mm", Package Reference=SML-LX1206IC, Reverse Voltage=5(Min)V, Supplier_Package=SMD, Datasheet URL=http://www.lumex.com/content/files/ProductAttachment/SML-LX1206IC-TR.pdf, Datasheet Version="Rev. J, 08/2012", Dimension=3.2x1.6x1.1mm, Dominant Wavelength=N/A, ECCN=EAR99, Family=SML-LX1206IC, HTS=8541402000, Intensity=6mcd, LED Material=GaAsP, Lens Appearance=ColorlessNonDiffused, Lens Dimensions=2x1.6x0.5mm, Manufacturer URL=http://www.lumexinstruments.com/, Mounting=SurfaceMount, Mounting Technology=SurfaceMount, Number of LEDs=1, Packaging=TapeandReel, Part No=SML-LX1206IC-TR, Peak Wavelength=635nm, Pin_Count=2, RoHS=Unknown, Supplier=Lumex, Supplier Standard Pack=3,000, Type=Uni-Color, Viewing Angle=160
Boot1 Reset1: library part CMP-10040-000001-2, "SWITCH TACTILE SPST-NO 0.05A 16V", Case/Package=SMD/SMT, Color=Black, Current Rating=50mA, Max Operating Temperature=85°C, Min Operating Temperature=-40°C, Operating Force=160gf, Package Quantity=2900, Voltage Rating (DC)=16V, Actuator Type=Standard, Contact Plating=Silver, Depth=4.6mm, Illumination Type=Non-Illuminated, Lead Free="Lead Free", Length=3.2mm, Max Current Rating=50mA, Mechanical Life=150000Cycles, Mount="Surface Mount", Orientation=Straight, Packaging="Tape and Reel", RoHS Compliant=Yes, Switch Function=Off-Mom, Switch Travel=0.15mm, Termination=J-Bend, Throw Configuration=SPST
C1 C2 C5 C6 C7 C8 C9 C10 C11 C12 C13 C14 C15 C16 C17 C18 C19 C22 C25 C28 C31 C32 Cboot1 Cboot2: library part CMP-2100-03606-3, "CAP CER 0.1UF 50V X7R 0805", Capacitance="100 nF", Manufacturer=Yageo, Package=CC0805-0.85, Temperature="-30°C to +85°C", Temperature Characteristic=X7R, Temperature Range High=+85°C, Temperature Range Low=-30°C, Tolerance=0.1, Voltage Rating="50 V", Automotive=No, Category=Cap, ComponentLink2Description=Datasheet, ComponentLink2URL=http://www.yageo.com/documents/recent/UPY-GPHC_Y5V_6.3V-to-50V_8.pdf, Device Class L1="Passive Components", Device Class L2=Capacitors, Device Class L3="Ceramic Capacitors", Digikey Description="CAP CER 0.1UF 50V X7R 0805", Footprint Url=http://www.yageo.com/exep/pages/download/literatures/UPY-C_GEN_24.pdf, Height=0.95mm, Ipc Land Pattern Name=CAPC200125X85, Lead Free=Yes, Manufacturer Part Number=CC0805KRX7R9BB104, Material=Ceramic, Mouser Description="Multilayer Ceramic Capacitors MLCC - SMD/SMT 100nF 50V X7R 10%", Octopart=https://octopart.com/cc0805krx7r9bb104-yageo-192993, RoHS=TRUE
C3 C4 C21 C24 C27 C30: library part CMP-2007-03236-1, Manufacturer=Kemet, Part Number=C0805C105K5RACTU
C20 C23 C26 C29 Cin1 Cin2: library part CMP-13271-001337-1, "Cap Ceramic 10uF 50V X5R ±10% SMD 1210 +85°C Embossed T/R", Capacitance=10uF, Case Code (Imperial)=1210, Case Code (Metric)=3225, Dielectric=X5R, Max Operating Temperature=85°C, Min Operating Temperature=-55°C, Tolerance=10%, Voltage Rating=50V, Case/Package=1210, Depth=2.5mm, Lead Free="Lead Free", Length=0.126inch, Mount="Surface Mount", Packaging="Tape and Reel", Thickness=0.106inch, Voltage Rating (DC)=50V, Width=0.098inch
C33 C36: library part CMP-03422-001390-1, "CAP CER 2.2UF 50V X7R 0805", Capacitance="2.2 uF", Manufacturer=Yageo, Package=CC0805-0.85, Temperature="-30°C to +85°C", Temperature Characteristic=X7R, Temperature Range High=+85°C, Temperature Range Low=-30°C, Tolerance=0.1, Voltage Rating="50 V", Automotive=No, Category=Cap, ComponentLink2Description=Datasheet, ComponentLink2URL=http://www.yageo.com/documents/recent/UPY-GPHC_Y5V_6.3V-to-50V_8.pdf, Device Class L1="Passive Components", Device Class L2=Capacitors, Device Class L3="Ceramic Capacitors", Digikey Description="CAP CER 2.2UF 50V X7R 0805", Footprint Url=http://www.yageo.com/exep/pages/download/literatures/UPY-C_GEN_24.pdf, Height=0.95mm, Ipc Land Pattern Name=CAPC200125X85, Lead Free=Yes, Manufacturer Part Number=CC0805KKX7R9BB225, Material=Ceramic, Mouser Description="0805 50 V 2.2 uF ±10% Tolerance X7R Multilayer Ceramic Capacitor", Octopart=https://octopart.com/cc0805kkx7r9bb225-yageo-51849248, RoHS=TRUE
C34: library part CMP-08246-004785-1, "Multilayer Ceramic Capacitors 4.7nF ±5% 25V C0G SMD 0603", Capacitance=4.7nF, Case Code (Imperial)=0603, Case Code (Metric)=1608, Dielectric=C0G, Dielectric Material=Ceramic, Max Operating Temperature=125°C, Min Operating Temperature=-55°C, Package Quantity=1, Tolerance=5%, Voltage Rating=25V, Case/Package=0603, Construction=Flat, Depth=0.8mm, Height=0.8mm, Lead Free="Lead Free", Length=1.6mm, Mount="Surface Mount", Number of Pins=2, Packaging="Tape and Reel", Radiation Hardening=No, RoHS Compliant=Yes, Series=C, Termination=SMD/SMT, Thickness=0.037inch, Voltage Rating (DC)=25V, Weight=7.1E-05oz, Width=0.031inch
C35 C39 Csns: library part CMP-001-00083-1, "SMD Capacitor C0G(EIA) with Capacitance: 100pF Tol. 5%. Rated Voltage: 50Vdc", Case/Package="1608 Murata", Check_prices=https://www.snapeda.com/parts/GRM1885C1H101JA01D/Murata+Electronics+North+America/view-part/?ref=eda, Component Type=Standard, Design Item ID=GRM1885C1H101JA01D, MF="Murata Electronics", MP=GRM1885C1H101JA01D, Pins=2, SnapEDA_Link=https://www.snapeda.com/parts/GRM1885C1H101JA01D/Murata+Electronics+North+America/view-part/?ref=snap, Source=GRM1885C1H101JA01D.SchLib
CADC Ccomp1: library part CMP-08246-000542-1, "Cap Ceramic 8.2nF 50V C0G 5% Pad SMD 0805 +125°C Automotive T/R", Capacitance=8.2nF, Case Code (Imperial)=0805, Case Code (Metric)=2012, Dielectric=C0G, Max Operating Temperature=125°C, Min Operating Temperature=-55°C, Package Quantity=1, Ratings=AEC-Q200, Tolerance=5%, Voltage Rating=50V, Case/Package=0805, Composition=Ceramic, Depth=1.25mm, Height=0.6mm, Length=2mm, Mount="Surface Mount", Packaging="Tape and Reel", REACH SVHC="No SVHC", Termination=SMD/SMT, Thickness=0.028inch, Voltage Rating (DC)=50V, Weight=0.000194oz, Width=0.049inch
Ccomp2: library part CMP-2008-04006-2, "Chip Multilayer Ceramic Capacitors for General Purpose, 0402, 390pF, C0G, 30ppm/°C, 5%, 50V", Capacitance=390pF, Case Code (Imperial)=0402, Case Code (Metric)=1005, Dielectric=C0G, Max Operating Temperature=125°C, Min Operating Temperature=-55°C, Package Quantity=1, Tolerance=5%, Voltage=50V, Case/Package=0402, Depth=0.5mm, Height=0.5mm, Length=1mm, Mount="Surface Mount", Packaging="Tape and Reel", Radiation Hardening=No, Termination=SMD/SMT, Thickness=0.022inch, Voltage Rating=50V, Voltage Rating (DC)=50V, Width=0.02inch
Cout1 Cout2 Cout3: library part CMP-13271-004028-1, "Cap Ceramic 10uF 50V X7R ±10% SMD 1210 +125°C Embossed T/R", Capacitance=10uF, Case Code (Imperial)=1210, Case Code (Metric)=3225, Dielectric=X7R, Max Operating Temperature=125°C, Min Operating Temperature=-55°C, Package Quantity=1, Tolerance=10%, Voltage Rating=50V, Case/Package=1210, Lead Free="Lead Free", Length=0.126inch, Mount="Surface Mount", Packaging="Tape and Reel", Thickness=0.106inch, Width=0.098inch
CR1: "No Description Available", Manufacturer_Name="Diodes Inc", Copyright="Copyright (C) 2026 Ultra Librarian. All rights reserved.", Manufacturer_Part_Number=BZT52C4V7-7-F
Cvcc: library part CMP-2006-02814-2, "Chip Multilayer Ceramic Capacitors for General Purpose, 0603, 10uF, X5R, 15%, 20%, 16V", Capacitance=10uF, Case Code (Imperial)=0603, Case Code (Metric)=1608, Dielectric=X5R, Max Operating Temperature=85°C, Min Operating Temperature=-55°C, Package Quantity=4000, Tolerance=20%, Voltage=16V, Case/Package=0603, Depth=0.8mm, Height=0.8mm, Lead Free="Lead Free", Length=1.6mm, Mount="Surface Mount", Packaging="Tape and Reel", REACH SVHC="No SVHC", Thickness=0.031inch, Voltage Rating=16V, Voltage Rating (DC)=16V, Width=0.031inch
Cvin: library part CMP-001-00084-1, "SMD Capacitor X7R(EIA) with Capacitance: 0.10uF Tol. 10%. Rated Voltage: 16Vdc", Case/Package="1005-2 Murata", Check_prices=https://www.snapeda.com/parts/GRM155R71C104KA88D/Murata/view-part/?ref=eda, Component Type=Standard, Design Item ID=GRM155R71C104KA88D, MF=Murata, MP=GRM155R71C104KA88D, Pins=2, SnapEDA_Link=https://www.snapeda.com/parts/GRM155R71C104KA88D/Murata/view-part/?ref=snap, Source=GRM155R71C104KA88D.SchLib
D1: library part CMP-2000-07093-2, "TVS DIODE 12V 19.9V DO214AA", Breakdown Voltage=13.3V, Clamping Voltage=19.9V, Manufacturer=Littelfuse, Max Junction Temp=+150°C, Package=SMBJ, Peak Pulse Current=30.2A, Peak Pulse Power=600W, Reverse Standoff Voltage=12V, Temperature="-65°C to +150°C", Temperature Range Low=-65°C, Automotive=No, Category=Diode, ComponentLink2Description=Datasheet, ComponentLink2URL=https://www.littelfuse.com/~/media/electronics/datasheets/tvs_diodes/littelfuse_tvs_diode_smbj_datasheet.pdf.pdf, Device Class L1="Circuit Protection", Device Class L2="TVS Diodes", Device Class L3=unset, Digikey Description="TVS DIODE 12V 19.9V DO214AA", Direction=Unidirectional, Height=2.61mm, Lead Free=Yes, Manufacturer Part Number=SMBJ12A, Mouser Description="Diode; 30.2 A (Max.); 13.30 V (Min.) @ 1 mA; 5 uA (Max.) @ 12 V; 100 A (Max.)", Number of Channels=1, Octopart=https://octopart.com/smbj12a-littelfuse-28708, RoHS=TRUE, Temperature Range High=+150°C
D2: library part CMP-004-00032-1, "Diode Schottky 40V 10A 3Pin PowerDI 5", Case/Package="PowerDIâ„¢-5 Diodes Inc.", Check_prices=https://www.snapeda.com/parts/PDS1040-13/Diodes+Inc./view-part/?ref=eda, Component Type=Standard, Design Item ID=PDS1040-13, MF="Diodes Inc.", MP=PDS1040-13, Pins=3, SnapEDA_Link=https://www.snapeda.com/parts/PDS1040-13/Diodes+Inc./view-part/?ref=snap, Source=PDS1040-13.SchLib
Dboot: library part CMP-004-00031-1, "Diode Schottky 20V 500mA Surface Mount SOD-523", Case/Package="SOD-523 Torex", Component Type=Standard, Design Item ID=XBS053V15R-G, Digi-Key_Part_Number=XBS053V15R-G-ND, Digi-Key_Purchase_URL=https://www.digikey.com/product-detail/en/torex-semiconductor-ltd/XBS053V15R-G/XBS053V15R-G-ND/2765022?utm_source=snapeda&utm_medium=aggregator&utm_campaign=symbol, MF=Torex, MP=XBS053V15R-G, Pins=2, SnapEDA_Link=https://www.snapeda.com/parts/XBS053V15R-G/Torex/view-part/808826/?ref=snap, Source=SnapEDAsch.SchLib
F2 F3 F4 F5: library part CMP-2000-05464-2, Color=Black, Current Rating=20A, Flammability Rating="UL94 V-0", Max Operating Temperature=145°C, Min Operating Temperature=-50°C, Voltage=500V, Approvals=UL, Body Material=Nylon, Contact Material=Brass, Contact Plating=Tin, Depth=6.73mm, Fuse Current=20A, Illumination Type=Illuminated, Lead Free="Lead Free", Length=16mm, Material="Brass, Nylon, Tin", Mount="PCB, Vertical", NexarPartId=8116161, Number of Circuits=1, Number of Poles=1, Orientation=Vertical, REACH SVHC="No SVHC", RoHS=Compliant, Termination="PC Pin", Voltage Rating (AC)=500V
J1 J2 J3 J4 J11 J12 J13 J14: library part CMP-17439-000179-1, "CONN WIRE HDR 2POS 1MM STSMD", Color=Natural, Contact Resistance=20mR, Flammability Rating="UL94 V-0", Max Current Rating=1A, Max Operating Temperature=85°C, Max Voltage Rating (AC)=50V, Min Operating Temperature=-25°C, Package Quantity=1500, Connector Type=Header, Contact Finish - Mating=TIN, Contact Material="Copper Alloy", Contact Plating=Tin, Contact Shape=Square, Contact Type="Male Pin", Depth=3.6mm, Fastening Type=Pull, Housing Color=Natural, Housing Material=Polyamide, Insulation Color=Natural, Insulation Material=Nylon, Lead Free="Lead Free", Length=4mm, Mated Stacking Heights=4.9mm, Max Voltage Rating (DC)=50V, Mount="Surface Mount", Number of Positions=2, Number of Rows=1, Orientation=Straight, Packaging="Tape and Reel", Pitch=0.039inch, Series=SR, Termination=Solder, Voltage Rating=50V
J5: "Socket; DC supply; XT90; male; PIN: 2; on PCBs; THT; Colour: yellow", Package=Package, Check_prices=https://www.snapeda.com/parts/XT90PW-M/AMASS/view-part/?ref=eda, MF=AMASS, MP=XT90PW-M, SnapEDA_Link=https://www.snapeda.com/parts/XT90PW-M/AMASS/view-part/?ref=snap
J6 J8: library part CMP-033-000000-2, Package=None, Availability=Unavailable, Component Type=Standard, Design Item ID=1017503, MP=1017503, Pin Count=4, Price=None, Source=1017503.SchLib
J7 J9: library part CMP-031-000000-2, Package=None, Availability=Unavailable, Component Type=Standard, Design Item ID=1862042, MF="{'manufacturer': u'Phoenix Contact'}", MP=1862042, Pin Count=4, Price=None, Source=1862042.SchLib
J10: library part CMP-0256-00001-1, "3 Conductor Power Jack, 2 break 2 aux contacts", ComponentLink1Description="Manufacturer URL", ComponentLink1URL=http://kycon.com/, ComponentLink2Description=Datasheet, ComponentLink2URL=http://anacapa.kycon.com/Catalog_PDF/KLDX_0202.pdf, Contact Finish=Brass, Mounting Technology="Through Hole", PackageDescription="Jack, 9 x 14.5 mm Body, 2.5 mm Center Pin Diameter", PackageReference=KLDX-0202-B, PartNumber=KLDX-0202-B
L1: library part CMP-006-00021-1, "Power inductor, shielded, 20% tol, SMT, RoHS, halogen-f", Case/Package=None, Check_prices=https://www.snapeda.com/parts/XAL6060-472MEB/Coilcraft/view-part/?ref=eda, Component Type=Standard, Design Item ID=XAL6060-472MEB, MF=Coilcraft, MP=XAL6060-472MEB, Pins=2, SnapEDA_Link=https://www.snapeda.com/parts/XAL6060-472MEB/Coilcraft/view-part/?ref=snap, Source=XAL6060-472MEB.SchLib
Q1 Q2: library part CMP-04962-000062-1, "MOSFET N-CH 30V 22A 6SON", Continuous Drain Current (ID)=22A, Drain to Source Breakdown Voltage=30V, Drain to Source Resistance=29mR, Gate to Source Voltage (Vgs)=20V, Input Capacitance=468pF, Max Operating Temperature=150°C, Max Power Dissipation=2.5W, Min Operating Temperature=-55°C, Package Quantity=3000, Contact Plating=Tin, Drain to Source Voltage (Vdss)=30V, Element Configuration=Single, Fall Time=26ns, Lead Free="Lead Free", Mount="Surface Mount", Number of Channels=1, Number of Elements=1, Number of Pins=6, Packaging="Tape and Reel", Power Dissipation=2.5W, Rds On Max=29mR, Rise Time=19ns, RoHS Compliant=Yes, Turn-Off Delay Time=8ns, Turn-On Delay Time=5.3ns
R1 R2 R3 R4 R5 R28 R29 R30 R31 RADC: library part CMP-2100-03615-2, "RES Thick Film, 4.7kΩ, 1%, 0.125W, 100ppm/°C, 0805", Case Code (Imperial)=0805, Case Code (Metric)=2012, Max Operating Temperature=155°C, Max Power Dissipation=125mW, Min Operating Temperature=-55°C, Package Quantity=10, Resistance=4.7kR, Temperature Coefficient=100ppm/°C, Tolerance=1%, Voltage Rating=150V, Case/Package=0805, Composition="Thick Film", Contact Plating=Tin, Depth=1.25mm, Features="Automotive AEC-Q200", Height=0.45mm, Lead Free="Lead Free", Length=2mm, Military Standard=Not, Number of Terminations=2, Packaging="Tape and Reel", Power Rating=125mW, Radiation Hardening=No, Termination=SMD/SMT, Voltage Rating (DC)=150V, Weight=0.000194oz, Width=1.25mm
R6 R7 R8 R9 R11 R13 R15 R17 R27: library part CMP-2100-03664-2, "RES 10K OHM 1% 1/10W 0603", Case Code (Imperial)=0603, Case Code (Metric)=1608, Max Operating Temperature=155°C, Max Power Dissipation=100mW, Min Operating Temperature=-55°C, Resistance=10kR, Resistance Tolerance=1%, Resistor Type="Thick Film", Temperature Coefficient=100ppm/°C, Voltage Rating=75V, Voltage Rating (DC)=50V, Case/Package=0603, Construction=Rectangular, Depth=0.8mm, Features="Moisture Resistant", Height=0.45mm, Lead Free="Lead Free", Lead Pitch=0.3mm, Length=1.6mm, Military Standard=Not, Number of Pins=2, Number of Terminations=2, Packaging="Tape and Reel", Power Rating=100mW, RoHS Compliant=Yes, Series=RC, Size Code=0603, Termination=SMD/SMT, Tolerance=1%, Weight=7.1E-05oz, Width=0.8mm
R10 R12 R14 R16: library part CMP-26527-000678-1, "47Ω ±1% 0.1W 0603 Thick Film Chip Resistor AEC-Q200 compliant", Case/Package=0603, Power Rating=100mW, Resistance=47R, RoHS Compliant=Yes
R18 Risns+ Risns-: library part CMP-2002-08143-1, Manufacturer="Vishay Dale", Part Number=CRCW040210R0FKED
R19 R24: library part CMP-02407-012085-1, "RES 10K OHM 1% 1/16W 0402", Case/Package=Molded, Max Operating Temperature=155°C, Min Operating Temperature=-55°C, Power Rating=62.5mW, Resistance=10kR, Resistor Type="Thick Film", Temperature Coefficient=100ppm/°C, Tolerance=1%, Contact Plating=Tin, Lead Free="Lead Free", Length=1mm, Mount="Surface Mount", RoHS Compliant=Yes, Termination=Wraparound
R20 Rpg: library part CMP-2002-08123-3, "RES Thick Film, 100kΩ, 1%, 0.063W, 100ppm/°C, 0402", Case Code (Imperial)=0402, Case Code (Metric)=1005, Max Operating Temperature=155°C, Max Power Dissipation=63mW, Min Operating Temperature=-55°C, Package Quantity=10000, Resistance=100kR, Temperature Coefficient=100ppm/°C, Tolerance=1%, Voltage Rating=50V, Case/Package=0402, Composition="Thick Film", Contact Plating=Tin, Depth=0.5mm, Features="Automotive AEC-Q200", Height=0.35mm, Lead Free="Lead Free", Length=1mm, Military Standard=Not, Mount="Surface Mount", Number of Pins=2, Number of Terminations=2, Packaging="Tape and Reel", Power Rating=63mW, Radiation Hardening=No, Termination=SMD/SMT, Voltage Rating (DC)=50V, Weight=2.3E-05oz, Width=0.02inch
R21: library part CMP-2002-02883-2, "RES SMD 48.7K OHM 0.1% 1/16W", Manufacturer=Yageo, Package=RT0402, Power Rating=0.063W, Resistance=48.7KΩ, Temperature="-55°C to +155°C", Temperature Coefficient="25 ppm/°C", Temperature Range High=+155°C, Temperature Range Low=-55°C, Tolerance=0.001, Voltage Rating=50V, Automotive=No, Category=Res, ComponentLink2Description=Datasheet, ComponentLink2URL=http://www.yageo.com/documents/recent/PYu-RT_1-to-0.01_RoHS_L_9.pdf, Composition="Thin Film", Device Class L1="Passive Components", Device Class L2=Resistors, Device Class L3="Chip SMD Resistors", Digikey Description="RES SMD 48.7K OHM 0.1% 1/16W", Footprint Url=http://www.yageo.com/exep/pages/download/literatures/PYu-R_Mount_10.pdf, Height=0.35mm, Ipc Land Pattern Name=RESC10050X30, Lead Free=Yes, Manufacturer Part Number=RT0402BRD0748K7L, Mouser Description="Thin Film Resistors - SMD 1/16W 48.7K ohm .1% 25ppm", Octopart=https://octopart.com/rt0402brd0748k7l-yageo-1374792, RoHS=TRUE, Series=RT
R22: library part CMP-2002-07708-2, "RES 499 OHM 1% 1/16W 0402", Case Code (Imperial)=0402, Case Code (Metric)=1005, Max Operating Temperature=155°C, Max Power Dissipation=63mW, Min Operating Temperature=-55°C, Package Quantity=1, Power Rating=62.5mW, Resistance=499R, Resistance Tolerance=1%, Resistor Type="Thick Film", Temperature Coefficient=100ppm/°C, Voltage Rating=50V, Case/Package=0402, Construction=Rectangular, Depth=0.5mm, Features="Moisture Resistant", Height=0.016inch, Lead Free="Lead Free", Length=0.039inch, Military Standard=Not, Number of Terminations=2, Packaging="Tape and Reel", REACH SVHC="No SVHC", RoHS Compliant=Yes, Series=RC, Size Code=0402, Termination=SMD/SMT, Tolerance=1%, Voltage Rating (DC)=50V, Width=0.02inch
R23: library part CMP-009-00180-1, "Resistor, SMD 1 kOhm 0603 0.1 %", Case/Package="1608-2 Panasonic", Check_prices=https://www.snapeda.com/parts/ERA-3AEB102V/Panasonic%20Electronic%20Components/view-part/260476/?ref=eda, Component Type=Standard, Design Item ID=ERA3AEB102V, Digi-Key_Part_Number=P1.0KDBCT-ND, MF=Panasonic, MP=ERA-3AEB102V, Pins=2, SnapEDA_Link=https://www.snapeda.com/parts/ERA-3AEB102V/Panasonic%20Electronic%20Components/view-part/260476/?ref=snap, Source=ERA3AEB102V.SchLib
R25: library part CMP-2002-08314-3, "63mW Thick Film Resistors 75V ±1% ±100ppm/℃ 1MΩ 0402 Chip Resistor - Surface Mount ROHS", Case Code (Imperial)=0402, Max Operating Temperature=155°C, Max Power Dissipation=63mW, Min Operating Temperature=-55°C, Ratings=AEC-Q200, Resistance=1MΩ, Temperature Coefficient=100ppm/°C, Tolerance=1%, Voltage Rating=50V, Case/Package=0402, China RoHS=Non-Compliant, ComponentLink1Description="Manufacturer's Website", ComponentLink1URL=http://www.vishay.com, ComponentLink2Description="Datasheet URL", ComponentLink2URL=http://www.vishay.com/docs/20035/dcrcwe3.pdf, Composition="Thick Film", Contact Plating=Tin, Depth=500µm, Features="Automotive AEC-Q200", Height=350µm, HelpURL=http://www.vishay.com/docs/20035/dcrcwe3.pdf, Lead Free="Lead Free", Length=1mm, Lifecycle Status=Production, Military Standard=Not, Mount="Surface Mount", Number of Pins=2, Number of Terminals=2, Number of Terminations=2, Packaging="Cut Tape", Power Rating=63mW, Radiation Hardening=No, REACH SVHC=Yes, RoHS=Compliant, Schedule B="8533210045, 8533210045", Termination=SMD/SMT, Voltage Rating (DC)=50V, Weight=652.039032µg, Width=500µm, Working Voltage=50V
R26: library part CMP-2002-08171-2, "RES Thick Film, 121kΩ, 1%, 0.063W, 100ppm/°C, 0402", Case Code (Imperial)=0402, Case Code (Metric)=1005, Max Operating Temperature=155°C, Max Power Dissipation=63mW, Min Operating Temperature=-55°C, Package Quantity=10, Resistance=121kR, Temperature Coefficient=100ppm/°C, Tolerance=1%, Voltage Rating=50V, Case/Package=0402, Composition="Thick Film", Contact Plating=Tin, Depth=0.5mm, Features="Automotive AEC-Q200", Height=0.35mm, Lead Free="Lead Free", Length=1mm, Military Standard=Not, Number of Terminations=2, Packaging="Tape and Reel", Power Rating=63mW, Radiation Hardening=No, Termination=SMD/SMT, Voltage Rating (DC)=50V, Weight=2.3E-05oz, Width=0.5mm
R32: library part CMP-2002-00024-1, Manufacturer="Vishay Dale", Part Number=CRCW0402475KFKED
R33: library part CMP-2002-03043-1, Manufacturer="Vishay Dale", Part Number=CRCW040210K0FKEDHP
Rcomp: library part CMP-1011-00593-3, "RES Thick Film, 5.36kΩ, 1%, 0.063W, 100ppm/°C, 0402", Case Code (Imperial)=0402, Case Code (Metric)=1005, Max Operating Temperature=155°C, Max Power Dissipation=63mW, Min Operating Temperature=-55°C, Package Quantity=10, Resistance=5.36kR, Resistance Tolerance=1%, Resistor Type="Thick Film", Temperature Coefficient=100ppm/°C, Voltage Rating=50V, Case/Package=0402, Construction=Rectangular, Contact Plating=Tin, Depth=0.5mm, Features="Automotive AEC-Q200", Height=0.016inch, Lead Free="Lead Free", Length=1mm, Military Standard=Not, Number of Pins=2, Number of Terminations=2, Packaging="Tape and Reel", Power Rating=63mW, Radiation Hardening=No, RoHS Compliant=Yes, Series=CRCW, Tolerance=1%, Voltage Rating (DC)=50V, Weight=2.3E-05oz, Width=0.5mm